# Altium PCB etb_drv.PcbDoc (part 2 of 2)
Units mil, origin at the board's own origin, x right, y up, seen from the top; angles counter-clockwise.
Board outline 2950 x 2250 mil, 2 copper layers (Top Layer, Bottom Layer), stack 44.882 mil thick; 125 components, 73 nets, 385 pads, 207 vias.
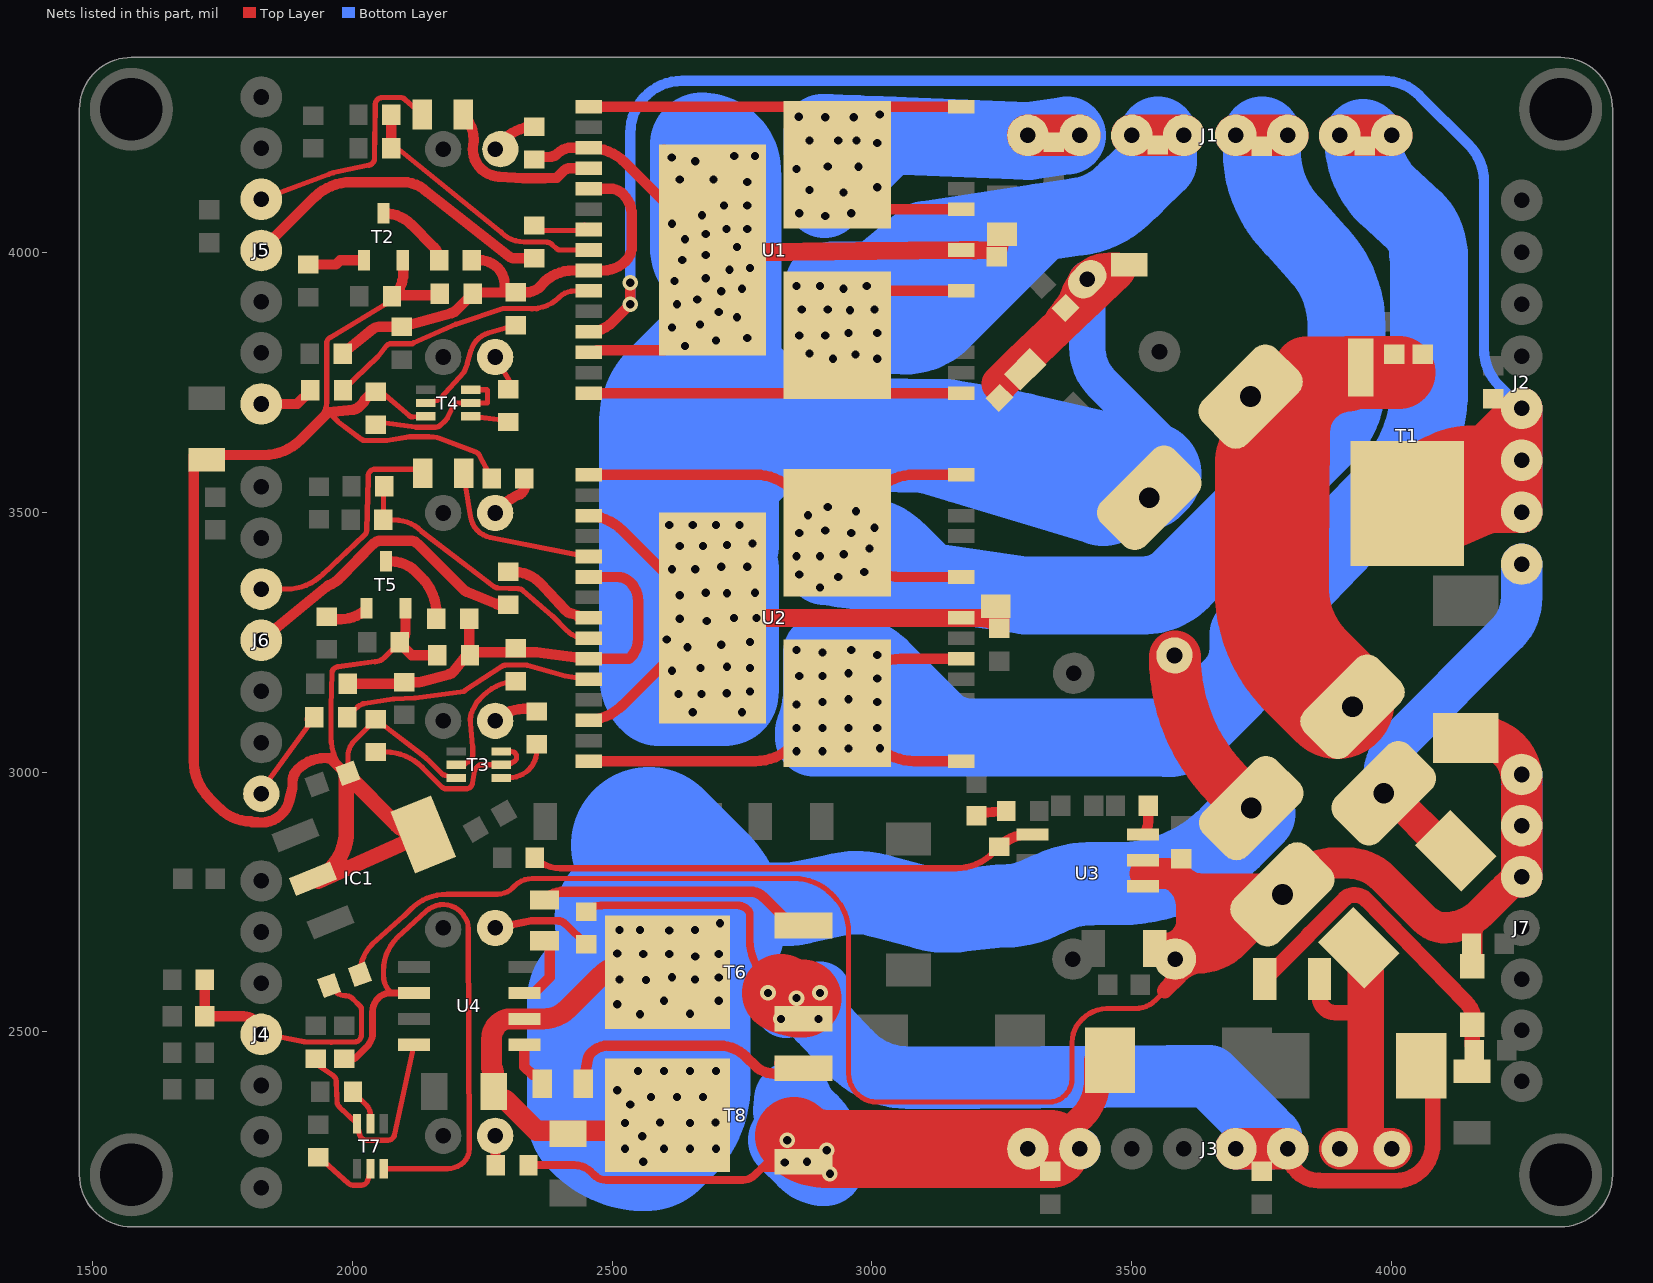
[diagram p2: the nets of this part, all layers, seen from the top]

## Via types
v1: diameter 30, hole 15.75, Top Layer to Bottom Layer, 199 vias
v2: diameter 30, hole 15.75, Top Layer to Bottom Layer, tented both sides, 6 vias
v3: diameter 40, hole 20, Top Layer to Bottom Layer, 2 vias

## Nets (pads, with @x,y where several pads share a name; then routed paths per layer and width w, separated by ;. In a path a pad name is that pad's centre, name@x,y a point inside that pad or via, vN(x,y) a via of type N, cw(c..) or ccw(c..) an arc to the next point about the centre after c; other vN are vias at no path point) (continued)
Hout1: C40.2 D5.1 J3.3 J3.4 R36.2 T6.1 | length 2305
  Top Layer w15: R36.2@2450,2731.5 cw(c2478.1,2703.39) 2478.1,2743.14 2479.53,2743.14 2739.88,2743.74 cw(c2739.88,2714.44) 2760.59,2735.16 cw(c2749.96,2724.52) 2765,2724.52 2765,2676.42 ccw(c2865,2676.42) 2794.29,2605.71 2825,2575
  Top Layer w30: J3.3@3800,2274 ccw(c3860,2274) 3860,2214 4007.16,2213.57 ; 4007.37,2213.57 ccw(c4007.37,2285.2) 4079,2285.2 4079,2422.89 ccw(c4056.89,2422.89) D5.1@4056.89,2445
  Top Layer w80: J3.4@3700,2275 J3.3@3800,2275
  Top Layer w150: 2825,2575 ccw(c2866.47,2649.61) v1@2866.47,2564.25
  Bottom Layer w80: J3.4@3700,2275 3743.92,2274.56
  Bottom Layer w120: 2834.58,2547.9 ccw(c2682.82,2704.39) 2837.44,2550.73 2841.4,2550.73 ccw(c2841.4,2633.6) 2868.25,2555.2 ; v1@2856.95,2567.09 2862.81,2560.93 2868.25,2555.2 ; v1(2900,2575) cw(c2841.4,2633.6) 2896.81,2571.97 cw(c2841.4,2633.6) 2868.25,2555.2 ; 3095.61,2412 3071.5,2412 ccw(c3071.33,2292) 3070.75,2412 cw(c3070,2565) 2959.09,2459.61 v1(2897.39,2524.54) 2873.43,2549.75 2868.25,2555.2 ; 3095.63,2412 3200,2412 ccw(c3200,2500) 3200.64,2412 3573.37,2414.73 cw(c3574.39,2294.73) 3573.74,2414.73 3574.06,2414.73 3649.12,2414.73 3744.37,2319.26 J3.3@3768.46,2295.11
  other v1: 2825,2525 2854.81,2565.05 2800,2575
Hout2: C41.2 D6.1 J3.7 J3.8 R35.2 T8.1 | length 1687.8
  Top Layer w15: R35.2@2339.1,2243.64 2427.07,2243.64 cw(c2427.07,2197.07) 2460,2230 2465.39,2224.61 ccw(c2488.59,2247.82) 2488.59,2215 2750.86,2215 ccw(c2750.86,2249.14) 2775,2225 2787.62,2237.62 ; 2787.62,2237.62 2855.77,2237.62 T8.1@2868.39,2250.24 2800.23,2250.24 2787.62,2237.62
  Top Layer w50: 3343.29,2275 3403.82,2335.53 ccw(c3333.11,2406.24) 3433.11,2406.24 D6.1@3433.11,2445
  Top Layer w150: 2850,2300 ccw(c2910.36,2360.36) 2910.36,2275 J3.8@3300,2275 3343.29,2275
  Bottom Layer w80: J3.8@3300,2275 J3.7@3400,2275
  Bottom Layer w150: v1(2836.86,2291.56) 2873.17,2255.25 ccw(c2910,2292.08) 2910,2240 2910,2253.58 ccw(c2810,2253.58) 2880.71,2324.29 2865,2340 cw(c2865,2364.14) 2847.93,2347.07 2845.96,2349.04 ccw(c2516.57,2398) 2848.28,2368.63
  other v1: 2918.99,2227.09 2832.19,2248.62 2875,2250 2912.94,2272.18
in1: R41.1 T7.6 U4.2 | length 1107.4
  Top Layer w10: 2068.46,2236.69 2182.87,2236.69 ccw(c2182.87,2282.13) 2215,2250 ccw(c2190.86,2274.14) 2225,2274.14 2223,2700.14 ccw(c2175,2700) 2221.71,2711.04 2217.83,2718.67 ccw(c2175,2697) 2142.67,2732.48 2086.87,2681.78 ccw(c2151.74,2616.92) 2060,2616.92 2060,2609.14 ccw(c2108.28,2609.14) 2074.14,2575
  Top Layer w13: 2005,2448.5 2027.47,2470.61 ccw(c2004.69,2493.78) 2034.18,2480.13 2037.97,2488.3 ccw(c2026.18,2493.78) 2039.19,2493.78 2039.19,2538.89 cw(c2076.11,2538.89) 2050,2565 cw(c2074.14,2540.86) 2074.14,2575 U4.2@2118.7,2575
in2: R45.1 T7.3 U4.4 | length 435.6
  Top Layer w10: R45.1@1930,2448.5 1930,2444.14 ccw(c1940,2444.14) 1934.26,2435.95 1963.68,2415.33 cw(c1956.22,2404.69) 1969.21,2405.15 1970.79,2364.8 ccw(c1983.78,2365.31) 1974.87,2355.85 2009.14,2323.57 cw(c2002.32,2316.26) T7.3@2009.41,2323.31 2014.47,2301.65 ccw(c2027.13,2304.61) 2027.13,2291.61 2068.46,2291.61 ccw(c2068.46,2304.61) 2074.22,2292.95 ccw(c2068.46,2304.61) 2081.18,2301.88 U4.4@2118.7,2475
ina_2sp30: J6.5 R6.1 | length 465.3
  Top Layer w10: J6.5@1825,3351.89 1873.21,3351.89 ccw(c1873.21,3451.89) 1943.92,3381.18 cw(c1951.03,3374.14) 1944.15,3381.41 2023.61,3455.83 ccw(c2014.72,3465.31) 2027.72,3464.94 2030.77,3563.79 ccw(c2007.78,3564.56) 2030.78,3564.56 2030.78,3569.69 cw(c2043.78,3569.69) 2043.78,3582.69 2117.08,3582.69 cw(c2117.08,3556.45) R6.1@2135.63,3575
ina_5019: J5.5 R4.1 | length 455.8
  Top Layer w10: J5.5@1825,4101.89 1954.98,4150.25 cw(c1997.96,4035) 1973.31,4155.5 2032.33,4167.58 ccw(c2029.72,4180.31) 2039.44,4171.67 ccw(c2029.72,4180.31) 2042.72,4180.16 2044.28,4284.88 cw(c2057.28,4284.69) 2057.28,4297.69 2092.72,4297.69 cw(c2092.72,4284.69) 2101.4,4294.36 R4.1@2135.77,4263.69
  Top Layer w20: R4.1@2135.77,4263.69 ccw(c2135.77,4269.06) R4.1@2139.57,4265.26
inb_2sp30: J6.1 R9.1 | length 189.6
  Top Layer w10: J6.1@1825,2958.19 1825,2961.57 cw(c1835,2961.57) 1826.91,2967.45 R9.1@1927.01,3105
  Top Layer w20: R9.1@1918.14,3101.33 cw(c1927.01,3092.45) R9.1@1927.01,3105
inb_5019: J5.1 R8.1 | length 106.5
  Top Layer w20: J5.1@1825,3708.19 1894.56,3708.19 1919.28,3732.91 R8.1@1919.28,3734.88
led_2sp30: LD4.2 R19.2 | length 100.4
  Top Layer w20: LD4.2@2278.6,3094.86 LD4.2@2275,3098.46 ; LD4.2@2281.61,3098.46 LD4.2@2275,3098.46 ; 2330.6,3121.5 ccw(c2330.61,3042.86) 2329.41,3121.49 ; R19.2@2355,3116.5 ccw(c2342.95,3104.45) 2342.95,3121.49 2329.41,3121.49 ; LD4.2@2275,3098.46 cw(c2330.61,3042.86) 2329.41,3121.49
led_3v: LD6.2 R32.2 | length 91.1
  Top Layer w20: LD6.2@2275,3498.46 2289.34,3512.8 cw(c2355,3447.14) 2319.97,3533.14 ccw(c2312.42,3551.66) 2330.19,3560.85 R32.2@2329.92,3561.37
led_5019: LD3.2 R30.2 | length 77.1
  Top Layer w10: LD3.2@2275,3798.46 2308.85,3741.78 2303.57,3736.5 R30.2@2300,3736.5
led_on: LD2.2 R5.2 | length 90.2
  Top Layer w20: LD2.2@2275,4198.46 2275,4200 2292.73,4217.73 cw(c2350,4160.47) R5.2@2350,4241.45
NetC34_2: C34.2 R38.1 | length 57.6
  Top Layer w20: C34.2@3201.06,2920.59 R38.1@3258.5,2925
NetLD1_2: LD1.2 R35.1 | length 56.8
  Top Layer w20: LD1.2@2275,2300 2275.55,2299.45 2275.55,2244.19 R35.1@2276.11,2243.64
NetLD5_2: LD5.2 R36.1 | length 198.9
  Top Layer w15: LD5.2@2275,2700 2344.36,2713.89 2398.76,2713.89 ; 2393.76,2713.89 cw(c2393.76,2690.25) 2410.47,2706.97 R36.1@2450,2668.5
NetR2_1: R2.1 R7.2 R12.2 R18.2 R27.2 U2.6 U2.10 | length 853.8
  Top Layer w20: R7.2@1991.5,3170 R12.2@2092.78,3170 ; R12.2@2100,3172.99 2127.96,3172.99 ccw(c2127.96,3192.99) 2133.18,3173.68 2185.92,3187.94 ccw(c2181.22,3205.31) 2195.25,3194.03 2214.39,3217.84 cw(c2229.98,3205.3) 2215.84,3219.45 2223.94,3227.55 R2.1@2225,3228.61 ; R27.2@2225,3295 R2.1@2225,3228.61 ; R2.1@2226.5,3225 ccw(c2221.39,3225) R2.1@2225,3228.61 ; R2.1@2239.98,3230.58 2315,3230.58 2354.45,3230.58 2450,3217.83 2529.77,3217.83 ccw(c2529.77,3225.23) 2535,3220 ccw(c2498.79,3256.21) 2550,3256.21 2550,3328.79 ccw(c2498.79,3328.79) 2535,3365 ccw(c2510.1,3340.1) 2510.1,3375.31 U2.6@2450,3375.31
NetR3_2: R3.2 T2.1 | length 111
  Top Layer w20: R3.2@1915,3976.5 1968.62,3976.5 1976.85,3984.72 T2.1@2022.6,3984.72
NetR4_2: R4.2 U1.4 | length 332.4
  Top Layer w20: R4.2@2213.43,4265.26 cw(c2164.71,4216.54) 2233.62,4216.54 cw(c2213.62,4216.54) 2233.48,4214.17 2232.36,4204.63 ccw(c2285,4198.46) 2233.62,4185.47 ccw(c2285,4198.46) 2275.59,4146.3 ccw(c2285,4198.46) 2281.82,4145.56 2329.26,4142.78 ccw(c2330.31,4160.75) 2330.31,4142.75 2369.69,4142.75 ccw(c2369.69,4160.75) 2371.63,4142.85 ccw(c2369.58,4162.75) 2371.73,4142.86 2389.81,4142.86 ccw(c2389.81,4150.23) 2394.99,4144.99 2406.58,4156.58 cw(c2419.4,4143.75) 2419.4,4161.89 U1.4@2455,4161.89
NetR6_2: R6.2 U2.5 | length 331.2
  Top Layer w10: R6.2@2214.37,3575 2227.58,3491 ccw(c2275,3498.46) 2265.63,3451.39 2447.46,3415.19 2448.43,3415 U2.5@2449.69,3415
NetR8_2: R8.2 U1.10 | length 555.6
  Top Layer w10: R8.2@1982.28,3734.88 2049.48,3799.5 ; 2050.43,3800.55 2065.07,3819.23 cw(c2075.31,3811.22) 2074.85,3824.21 ; 2069.41,3822.8 cw(c2075.31,3811.22) 2075.31,3824.22 2114.69,3824.22 cw(c2114.69,3811.22) 2115.6,3824.19 ccw(c2110.29,3833.7) 2117.99,3825.99 2199.11,3861.39 2210,3865 ; 2204.55,3863.2 2290.29,3892.08 2354.49,3891.51 ; 2345.16,3891.5 ccw(c2345.16,3967.16) 2348.21,3891.56 ccw(c2345.16,3967.16) 2398.66,3913.66 cw(c2427.65,3884.68) 2427.65,3925.67 ; 2423.39,3925.67 2427.65,3925.67 ; U1.10@2455,3925.67 2427.65,3925.67
NetR9_2: R9.2 U2.11 | length 490.2
  Top Layer w10: R9.2@1990,3105 2010.71,3125.71 ; 2010.74,3125.74 cw(c2017.74,3118.6) 2013.09,3127.45 2019.21,3130.69 cw(c2025.31,3119.21) 2023.35,3132.06 2078.3,3140.56 cw(c2080.31,3127.72) 2079.84,3140.71 2120.19,3142.29 ccw(c2119.69,3155.28) 2121.42,3142.39 2215,3155 2215.71,3155.71 ; 2215.74,3155.74 cw(c2222.74,3148.6) 2217.28,3156.98 2288.17,3203.58 cw(c2295.31,3192.72) 2295.31,3205.72 2334.69,3205.72 cw(c2334.69,3192.72) 2338.23,3205.22 2410,3185 U2.11@2450,3178.46
NetR10_1: R10.1 R11.1 R15.2 R17.2 R22.2 U1.5 U1.9 | length 921.4
  Top Layer w20: R15.2@1981.5,3805 2039.09,3851.98 cw(c2051.74,3836.5) 2051.74,3856.5 R17.2@2095,3856.5 2189.02,3882.47 ; 2190.16,3882.75 ccw(c2186.22,3900.31) 2198.92,3887.56 R11.1@2231.5,3920 ; R10.1@2230,3985 2243.79,3985 cw(c2243.79,3933.79) 2280,3970 cw(c2248.9,3938.9) 2292.88,3938.9 2292.88,3922.68 ; R11.1@2239.21,3922.68 2292.88,3922.68 ; 2363,3935.25 2369.64,3942.14 ; 2367.12,3940.87 cw(c2425.47,3882.52) 2376.29,3948.78 ; U1.5@2455,4122.52 2495.6,4122.52 cw(c2495.6,4086.6) 2521,4112 cw(c2479.96,4070.96) 2538,4070.96 2538,4011.97 cw(c2497.03,4011.97) 2526,3983 cw(c2482.64,4026.36) 2482.64,3965.04 U1.9@2455,3965.04 2425.47,3965.04 ccw(c2425.47,3882.52) 2376.29,3948.78 ; 2292.88,3922.68 2314.68,3922.68 R22.2@2315,3922.99 2334.01,3922.99 ccw(c2334.01,3963.99) 2363,3935 2363,3935.49 2376.29,3948.78
NetR10_2: R10.2 T2.3 | length 148.4
  Top Layer w20: T2.3@2060,4075.28 cw(c2060,3998.15) 2114.53,4052.69 2156.25,4010.97 cw(c2130.28,3985) R10.2@2167.01,3985
NetR13_2: R13.2 U1.7 | length 112.3
  Top Layer w10: R13.2@2350,4051.5 2359.52,4041.97 U1.7@2446.81,4041.97 ; U1.7@2446.81,4051.97 U1.7@2455,4043.78
NetR14_2: R14.2 U2.8 | length 195.1
  Top Layer w20: R14.2@2300,3385 2311.72,3385 cw(c2311.72,3316.72) 2360,3365 2360.04,3364.96 cw(c2345.93,3350.79) 2360.53,3364.46 2411.3,3310.51 ccw(c2424.41,3322.85) 2419.34,3305.58 2437.63,3300.21 2450,3296.57 U2.8@2436.56,3296.57
NetR16_1: R16.1 T3.5 T3.6 | length 369.7
  Top Layer w10: R16.1@2045,3038.5 2063.79,3038.5 cw(c2063.79,2938.5) 2134.5,3009.21 2171.32,2972.4 ccw(c2181.34,2980.68) 2178.46,2968 2179.88,2967.68 2218.74,2967.68 ccw(c2218.74,2980.68) 2231.59,2978.75 ; 2231.6,2978.79 2235.11,3001.87 cw(c2244.99,3000.32) 2238.3,3007.76 2239.46,3008.8 ccw(c2218.74,3031.86) 2240.62,3009.9 2241.97,3011.24 cw(c2249.01,3004.14) 2248.9,3014.14 2248.95,3014.14 T3.5@2286.65,3014.14 2292.65,3014.14 ccw(c2292.65,3047.41) 2311.99,3020.34 ccw(c2306.18,3028.48) 2316.17,3028.81 2316.15,3029.6 ccw(c2306.15,3029.3) 2309.49,3038.73 ccw(c2303.6,3021.95) 2303.6,3039.73 T3.6@2286.65,3039.73
NetR18_1: R18.1 T3.2 | length 230.6
  Top Layer w10: T3.2@2209.49,3014.14 ccw(c2209.49,3031.41) 2221.69,3019.2 ccw(c2218.74,3031.86) 2231.74,3031.86 2231.74,3047.61 ccw(c2218.74,3047.61) 2231.67,3048.91 2227.23,3093.73 cw(c2275,3098.46) 2232.54,3120.85 2240,3135 2252.17,3147.17 cw(c2317.99,3081.36) 2317.99,3174.44 ccw(c2316.63,3173.07) 2316.63,3175 R18.1@2315,3175
NetR19_1: R19.1 T3.4 | length 111.4
  Top Layer w10: T3.4@2286.65,2988.55 T3.4@2287.37,2989.27 ; T3.4@2288.08,2989.98 T3.4@2287.37,2989.27 ; R19.1@2355,3053.5 2355,3041.88 cw(c2302.19,3041.88) 2339.53,3004.53 cw(c2302.69,3041.38) 2302.69,2989.27 T3.4@2287.37,2989.27
NetR20_2: R20.2 R23.2 U2.9 | length 532.5
  Top Layer w10: R23.2@2061.5,3550 ccw(c2065.11,3546.39) 2060,3546.39 R20.2@2060,3485 2080.76,3485 cw(c2080.76,3411.16) 2132.97,3463.37 2272.43,3356.95 ccw(c2280.31,3367.28) 2272.7,3356.74 ccw(c2280.31,3367.28) 2279.81,3354.29 2320.11,3352.72 ; 2320.16,3352.72 cw(c2319.69,3339.72) 2328.27,3349.49 ; 2328.3,3349.46 2384.46,3300.51 cw(c2377.91,3292.95) 2384.99,3300.01 2412.1,3272.9 ccw(c2450,3310.81) U2.9@2450,3257.2
NetR21_1: R21.1 T4.5 T4.6 | length 291.2
  Top Layer w10: R21.1@2050,3673.5 2121.21,3663.66 ccw(c2122.99,3676.54) 2122.99,3663.54 2160.39,3663.54 ccw(c2160.39,3676.54) 2169.29,3667.06 2180.56,3677.64 ccw(c2173.71,3684.93) 2182.7,3680.55 2194.3,3704.38 cw(c2203.29,3700) 2203.29,3710 T4.5@2228.31,3710 2260,3710 2260,3735 ccw(c2258.57,3733.57) 2258.57,3735.59 T4.6@2228.31,3735.59
NetR22_1: R22.1 T4.2 | length 246.3
  Top Layer w10: T4.2@2141.69,3710 2163.35,3715.06 ccw(c2160.39,3727.72) 2170.05,3719.01 2215.25,3769.17 2219.88,3781.44 ccw(c2175,3798.46) 2221.08,3785.02 2228.92,3811.9 cw(c2275,3798.46) 2261.7,3844.58 R22.1@2315,3860
NetR26_2: R26.2 R29.2 U1.8 | length 512.5
  Top Layer w10: R26.2@2075,4200 2083.58,4200 cw(c2083.58,4190) 2089.91,4197.74 2286.13,4038.78 cw(c2279.87,4030.99) 2286.97,4038.03 ; 2287,4038 ccw(c2330.46,4081.46) 2330.46,4020 2375.59,4019.19 ; 2374.97,4019.22 cw(c2374.69,4006.22) 2385.05,4014.07 2392.01,4008.35 ccw(c2399.97,4014.41) 2399.97,4004.41 U1.8@2455,4004.41
  Top Layer w20: R26.2@2075,4200 R29.2@2075,4265
NetR27_1: R27.1 T5.3 | length 170.8
  Top Layer w20: T5.3@2065,3405.28 2074.56,3405.28 cw(c2074.56,3338.07) 2122.09,3385.59 2132.72,3374.96 cw(c2062.01,3304.25) 2162.01,3304.25 R27.1@2162.01,3295 ccw(c2154.78,3295) R27.1@2159.89,3300.11
NetR28_2: R28.2 T5.1 | length 82.1
  Top Layer w20: R28.2@1950.98,3294.08 1977.75,3294.08 ccw(c1977.75,3364.57) T5.1@2027.6,3314.72
NetR30_1: R30.1 T4.4 | length 80.2
  Top Layer w10: T4.4@2228.31,3684.41 R30.1@2304.62,3675.33 ; R30.1@2299.62,3670.33 2299.62,3673.13 R30.1@2300,3673.5
NetR40_2: R40.2 T6.2 | length 539.7
  Top Layer w20: R40.2@2387.59,2760.71 2380.61,2753.74 R40.2@2370,2753.74 cw(c2409.25,2714.49) 2409.25,2770 2764.29,2770 cw(c2764.29,2731.42) 2791.57,2758.7 2822.25,2728.02 ccw(c2864.47,2770.24) T6.2@2864.47,2710.53
NetR42_2: R42.2 T7.2 | length 74.4
  Top Layer w10: R42.2@2001.5,2385 2026.87,2359.62 ; 2026.87,2359.63 cw(c2007.25,2340) 2035,2340 T7.2@2035,2323.31
NetR44_2: R44.2 T8.2 | length 507.6
  Top Layer w20: R44.2@2441.29,2416.5 2444.37,2413.42 R44.2@2444.37,2400 2453.03,2447.22 cw(c2472.86,2444.57) 2458.64,2458.63 ; 2460,2460 cw(c2493.08,2426.92) 2493.08,2473.7 2705,2473.7 cw(c2705,2398.14) 2758.43,2451.57 2775,2435 ccw(c2811.78,2471.78) 2811.78,2419.76 ; T8.2@2821.78,2439.76 T8.2@2878.39,2439.76
NetR46_2: R46.2 T7.5 | length 156.9
  Top Layer w10: R46.2@1935,2258.5 1936.97,2258.5 1992.85,2208.32 ccw(c2001.54,2217.99) 2001.54,2204.99 2017.28,2204.99 ccw(c2017.28,2217.99) 2029.95,2215.06 T7.5@2035,2236.69 2035,2225.87 T7.5@2032.13,2222.99
out1: R40.1 U4.7 | length 138
  Top Layer w20: U4.7@2331.3,2575 2350,2575 2379.81,2604.81 2379.81,2675.19 R40.1@2375,2680
out2: R44.1 U4.5 | length 95.1
  Top Layer w20: U4.5@2331.3,2475 2331.3,2433.19 2346.93,2417.56 2356.93,2417.56 2365.63,2408.86 R44.1@2365.63,2400
outa_2sp30: C16.2 J1.5 J1.6 U2.1 U2.25 U2.30 U2.31 | length 3181.4
  Top Layer w20: U2.1@2450,3572.16 U2.1@2455,3572.16 2775.31,3572.16 cw(c2775.31,3472.16) 2846.02,3542.87 U2.31@2928.35,3460.55 ; U2.25@3166.54,3375.31 3055,3375.31 cw(c3055,3475.31) 2984.29,3404.6 U2.31@2928.35,3460.55 ; U2.30@3166.54,3572.16 3081.38,3572.16 ccw(c3081.38,3472.16) 3010.67,3542.87 v1(2969.51,3501.71) U2.31@2928.35,3460.55
  Top Layer w80: J1.5@3700,4225 J1.6@3800,4225
  Bottom Layer w150: 3750,4225 3750,4195.3 ccw(c3955.39,4195.3) 3810.16,4050.07 ; 3810.51,4050.38 3861.28,3993.13 ; 3862.66,3992.06 cw(c3712.26,3859.1) 3913,3859.1 3913,3744.5 ; 3878.7,3654.89 3594.29,3369.29 cw(c3523.58,3440) 3523.58,3340 3294.91,3339.96 3104.44,3367.84 ; 3881.2,3656.48 ccw(c3768.49,3747.5) 3913.36,3747.5 ; 3104.44,3367.84 2992.45,3384.24 2988.39,3384.83 2985.05,3385.32 2949.82,3390.48 2941.55,3391.69 2937.53,3392.28 2908.35,3396.55 2908.35,3454 ccw(c2910,3840) 2915.84,3454.04 2976.82,3454.04 cw(c2976.82,3354.04) 3047.53,3424.75 3104.44,3367.84
  other v1: 2900,3355 2935,3375 2860,3380 2985,3385 2855,3415 2900,3415 2945.56,3419.12 2995,3430 2860,3460 2960,3460 2910,3465 3005,3470 2877.09,3494.01 2915,3510
outa_5019: C14.2 J1.1 J1.2 U1.1 U1.25 U1.30 U1.31 | length 1965.4
  Top Layer w20: U1.1@2455,4280 2840,4280 v1(2859.12,4260.88) 2933.35,4186.65 U1.31@2933.35,4168.39 3018.58,4083.15 U1.25@3171.54,4083.15 ; U1.31@2928.35,4194.96 3013.39,4280 U1.30@3171.54,4280
  Top Layer w80: J1.1@3300,4225 J1.2@3400,4225
  Bottom Layer w150: J1.2@3375,4225 3301.67,4213.94 3299.56,4214.02 3038.56,4224.59 ; 3038.56,4224.59 ccw(c3038.56,4205.03) 3024.73,4218.86 2908.59,4102.72 2908.59,4143.4 ccw(c2725.59,4143.4) 2908.33,4153.11 ccw(c2725.42,4158.76) 2907.84,4173.25 ccw(c2672.94,4154.52) 2905,4195.47 2905,4230 2908.78,4229.85 2917.61,4229.49 2935.56,4228.76 2963.69,4227.62 2970.5,4227.35 2976.63,4227.1 3010.64,4225.72 3013.41,4225.61 3038.56,4224.59
  other v1: 2910,4070 2860,4075 2960,4075 2945,4115 2880,4120 3010,4125 2855,4160 2915,4165 2974.1,4164.53 3010,4210 2880,4215 2935,4215 2970,4215 2910,4260 2965,4260 3015,4265
outb_2sp30: C15.2 J1.7 J1.8 U2.15 U2.16 U2.21 U2.32 | length 3784
  Top Layer w20: U2.15@2455,3020.98 2775.31,3020.98 ccw(c2775.31,3120.98) 2846.02,3050.27 U2.32@2928.35,3132.6 ; U2.32@2930.85,3130.1 3010.67,3050.27 ccw(c3081.38,3120.98) 3081.38,3020.98 U2.16@3166.54,3020.98 ; U2.32@2984.29,3188.54 cw(c3055,3117.83) 3055,3217.83 U2.21@3166.54,3217.83
  Top Layer w80: J1.7@3900,4225 J1.8@4000,4225
  Bottom Layer w150: v1@2903.4,3149.22 cw(c2720.77,3160.91) 2903.4,3149.17 ccw(c2928.35,3147.6) 2903.35,3148.11 cw(c2720.38,3151.4) 2888.1,3078.19 2888.1,3066.16 3190.26,3066.16 ; v1@2903.4,3149.26 ccw(c2720.77,3160.91) 2903.77,3160.91 ccw(c2720.77,3160.91) 2903.77,3161.1 2903.77,3228.73 cw(c2945.81,3189.19) v1(2905,3230) 2943.58,3230 cw(c2943.58,3130) 3014.29,3200.71 3119.55,3095.45 ccw(c3190.26,3166.16) 3190.26,3066.16 ; 3297.73,3066.16 3190.26,3066.16 ; 3562.45,3066.16 3190.26,3066.16 ; 3566.72,3065 ccw(c3566.72,3133.28) 3615,3085 3694.98,3164.98 ccw(c3624.27,3235.69) 3724.27,3235.69 3724.27,3264.27 3992.3,3541.81 ; 3950,4215 3945,4220 ccw(c4101.92,4220) 3990.96,4109.04 4043.74,4061.26 cw(c3980.34,3997.86) 4070,3997.86 ; 3992.82,3542.34 3992.3,3541.81 ; 4072,3997.86 4072,3738.31 cw(c3789.9,3738.31) 3992.3,3541.81
  other v1: 2855,3040 2905,3040 2955,3045 3015.45,3045.8 2855,3085 2905,3085 2955,3085 3010,3085 2855,3130 2905,3135 3010,3135 2955,3140 3010,3180 2860,3185 2905,3185 2955,3190 3010,3225 2855,3235 2960,3235
outb_5019: C13.2 J1.3 J1.4 U1.15 U1.16 U1.21 U1.32 | length 2366.6
  Top Layer w20: U1.15@2455,3728.82 2840,3728.82 U1.32@2933.35,3822.17 ; U1.32@2949.53,3805.99 3026.69,3728.82 U1.16@3171.54,3728.82 ; U1.32@3018.58,3925.67 U1.21@3171.54,3925.67
  Top Layer w80: J1.3@3500,4225 J1.4@3600,4225
  Bottom Layer w150: v1@2915,3852.07 v1(2915,3890) 2915,3919.52 ccw(c2893.1,3919.52) 2908.59,3935 2908.59,3941.33 cw(c2925.19,3909.81) 2925.19,3945.43 3008.35,3945.43 3101.94,4024.03 3321.83,4057.19 ; v1@2917.44,3844.98 2950.45,3841.96 cw(c2953.26,3428.97) v1@2959.85,3841.92 ; v1@2959.89,3841.92 2969.1,3841.78 3004.24,3841.23 3009.94,3841.14 3010.72,3841.13 3062.46,3840.32 3069.69,3840.21 ccw(c3063.21,3940) 3133.93,3869.29 3321.83,4057.19 ; 3550,4225 3550,4175 3504.29,4129.29 cw(c3433.58,4200) 3492.06,4118.89 cw(c3375,4225) 3405.99,4070.07 cw(c3375,4225) 3398.56,4068.77 3321.83,4057.19
  other v1: 2925,3795 3010,3795 2968.51,3803.51 2880,3805 2860,3840 2910,3840 2955,3845 3010,3845 2957.76,3888.4 2865,3890 3005,3890 2945,3930 2855,3935 2900,3935 2990,3935
pwm_2sp30: J6.4 R14.1 | length 590.4
  Top Layer w20: J6.4@1825,3253.46 1951.07,3356.67 1951.11,3356.7 cw(c1963.69,3341.15) 1954.99,3359.16 1961.77,3362.44 ccw(c1944.15,3398.92) 1972.83,3370.3 1976.28,3373.75 ccw(c1960,3390) 1976.4,3373.87 2040.75,3439.03 cw(c2055,3425) 2041.46,3439.72 cw(c2055,3425) 2055,3445 2111.21,3445 cw(c2111.21,3423.79) 2126.21,3438.79 2213.7,3351.3 ccw(c2227.79,3365.5) 2220.12,3347.02 2276.75,3323.53 ccw(c2284.41,3342.01) 2284.41,3322.01 R14.1@2300,3322.01
pwm_5019: J5.4 R13.1 | length 623.8
  Top Layer w20: J5.4@1825,4003.46 1927.25,4105.71 cw(c1997.96,4035) 1997.96,4135 2096.72,4135 cw(c2096.72,4066.72) 2145,4115 2300.56,3992.78 ccw(c2312.92,4008.5) 2312.92,3988.5 R13.1@2350,3988.5
sense: R37.1 R39.2 U3.5 | length 982
  Top Layer w12: R37.1@2351.5,2835 ccw(c2399.78,2883.28) 2399.78,2815 3162.08,2815 ccw(c3162.08,2915) 3232.79,2844.29 R39.2@3245,2856.5
  Top Layer w20: R39.2@3245,2856.5 cw(c3301.74,2799.75) 3301.74,2880 U3.5@3309.02,2880
ss: C33.2 U3.4 | length 57.6
  Top Layer w20: U3.4@3521.61,2880 ccw(c3497.76,2903.86) 3531.5,2903.86 C33.2@3531.5,2935
v_d: C23.2 C24.2 D3.1 F3.1 | length 635.8
  Top Layer w30: F3.1@3755.94,2601.76 3838.67,2684.49 cw(c3858.09,2672.18) 3841.85,2688.46 3910.02,2756.63 cw(c3926.3,2740.38) 3926.4,2763.38 3929.2,2763.38 cw(c3929.19,2733.38) 3950.38,2754.62 4141.4,2558.6 cw(c4096.51,2513.7) D3.1@4160,2513.7 ; D3.1@4155,2513.7 4155,2479.07 ccw(c4185,2479.07) C23.2@4158.5,2465
v_main: D2.1 F2.2 J2.8 | length 777
  Top Layer w40: F2.2@3980.24,2974.32 F2.2@3999.55,2974.32 ; D2.1@4118.26,2843.26 ccw(c4135.06,2843.26) D2.1@4123.18,2831.38
  Top Layer w60: F2.2@3980.24,2974.32 D2.1@4123.18,2831.38
  Bottom Layer w60: F2.2@3984.55,2959.32 F2.2@3984.98,2959.32
  Bottom Layer w80: F2.2@3984.98,2959.32 3984.98,2988.56 cw(c4084.98,2988.56) 4014.27,3059.27 4220.71,3265.71 ccw(c4150,3336.42) 4250,3336.42 J2.8@4250,3400
Vbrige: C4.2 C5.2 C6.2 C7.2 C8.1 C9.2 C10.2 C11.2 C12.2 F1.1 R5.1 U1.3 U1.13 U1.23 U1.33 U2.3 U2.13 U2.23 U2.33 | length 8463.3
  Top Layer w20: R5.1@2350,4178.46 cw(c2361.84,4166.62) 2361.84,4183.37 2378.99,4183.37 ccw(c2378.99,4206.01) 2395,4190 cw(c2422.18,4162.82) 2422.18,4201.26 U1.3@2455,4201.26 cw(c2455,4101.46) 2525.57,4172.03 U1.33@2693.19,4004.41 ; U2.13@2450,3099.72 ccw(c2450,3199.52) 2520.57,3128.95 2688.19,3296.57 2520.57,3464.19 ccw(c2450,3393.62) U2.3@2450,3493.42 ; U1.13@2455,3807.56 2467.5,3807.56 2471.59,3811.65 2599.84,3811.65 2693.19,3905 2693.19,3999.49 U1.33@2693.19,4004.41 ; U1.33@2599.84,4197.17 v1(2614.63,4182.37) 2693.19,4103.82 U1.33@2693.19,4004.41
  Top Layer w35: U2.33@2688.19,3296.57 U2.33@2693.19,3296.57 U2.23@3171.54,3296.57 U2.23@3179.85,3296.57 ; U1.33@2693.24,3999.49 2735.91,3999.93 2764.69,4000.23 U1.23@3171.54,4004.41 3192.41,4004.41 cw(c3192.41,3969.41) 3197.62,4004.02 3197.76,4004 ; U2.23@3182.12,3296.65 cw(c3179.85,3331.57) U2.23@3179.85,3296.57 ; 3201.06,4004.41 C4.2@3240.19,4002.22 ; C4.2@3240,3991.5 C5.2@3250,4034.57 ; C9.2@3247,3276.5 C9.2@3247,3279.5 ; C10.2@3247,3310.34 C9.2@3247,3279.5 ; U2.23@3179.85,3296.57 3210.93,3296.57 cw(c3210.93,3250.71) 3243.36,3283.14 C9.2@3247,3279.5
  Top Layer w70: 3245.7,3747.14 3283.98,3785.53 3284.25,3785.78 3383.71,3880.75 3433.18,3927.98 3471.82,3964.89 3458.65,3964.77 3458.5,3964.77 ccw(c3459.4,3894.78) 3416.85,3950.36 C8.1@3413.94,3948.13 3403.37,3929.4 ccw(c3464.34,3895.01) 3397.49,3915.75 cw(c3327.73,3937.27) 3383.86,3890.6 3380.88,3886.48 3374.12,3877.18 cw(c3315,3920) 3366.64,3868.4 3366.5,3868.26
  Bottom Layer w70: 2955.37,3647.43 2997.46,3689.53 ; 3240,3630 3285.2,3630 3506.23,3630 cw(c3506.23,3530) 3576.94,3600.71 3590.93,3586.72 ccw(c3561.12,3586.72) 3582.2,3607.8 3443.57,3746.43 cw(c3514.28,3817.14) 3414.28,3817.14 3414.28,3948.13 C8.1@3413.94,3948.13
  Bottom Layer w150: v1(2682.22,3290.6) v1@2688.19,3296.57
  Bottom Layer w157.48: 3310,3555 3322.05,3556.21
  Bottom Layer w200: 2693.19,3545.94 cw(c2788.19,3514.71) 2717.48,3585.43 2727.92,3595.86 2812.94,3666.15 ; 2693.19,3651.52 2693.19,3757.78 ; v1@2720.77,3390 v1(2720.77,3344.06) v1(2720.77,3202.47) 2720.77,3160.91 ccw(c2928.35,3147.6) v1(2720.38,3151.4) cw(c2711.11,3183.89) 2711.11,3150.11 v1(2672.15,3150.11) v1(2627.69,3150.11) 2589.84,3150.11 cw(c2625.68,3185.94) 2575,3185.94 2575,3675 cw(c2671.17,3675) 2603.17,3743 v1@2693.19,3833.02 ; v1(2720.77,3437.09) 2720.77,3539.34 cw(c2820.77,3539.34) 2734.27,3589.51 ; 2725.42,4158.76 ccw(c2672.94,4154.52) 2672.94,4207.17 v1(2672.94,4071.42) 2672.94,4007.24 ccw(c2703.73,4007.24) 2693.19,3978.31 v1@2693.19,3833.02 ; 2725.59,4143.4 v1(2725.59,3966.23) 2725.59,3790.18 cw(c2693.19,3790.18) 2693.19,3757.78 ; 2753.34,3746.28 2803.99,3695.64 ; 2791.53,3642.52 2796.75,3651.39 2796.78,3651.44 ; 2843.92,3650.7 2847.19,3647.43 ; 3112.05,3635.34 3445,3535 ; 3223.97,3643.97 3285.2,3630 F1.1@3533.74,3573.28 ; F1.1@3505,3565.01 3509.94,3565.01 F1.1@3525,3565 ; 2693.19,3757.78 v1@2693.19,3833.02
  Bottom Layer w210: 2787.19,3642.43 2791.53,3642.52 ; 2989.05,3645.49 3059.45,3647.35
  Bottom Layer w220: v1@2688.19,3296.57 2688.19,3502.01 cw(c2788.19,3502.01) 2717.48,3572.72 2734.27,3589.51 2787.19,3642.43 ; 2791.53,3651.52 2796.78,3651.44 2843.92,3650.7 2853.75,3650.55 cw(c2850.51,3430.57) 2869.23,3649.78 2889.42,3648.07 cw(c2871.1,3428.84) 2891.92,3647.85 ccw(c2910,3840) 2928.74,3647.91 cw(c2950.14,3428.95) 2948.97,3648.95 2951.79,3648.97 cw(c2953.26,3428.97) 2956.72,3648.95 2956.88,3648.94 ; 2845.64,3649.07 3059.45,3647.35 3142.07,3646.06 3240,3630
  other v1: 2655,3115 2750,3115 2765,3155 2615,3195 2670,3200 2765,3200 2645,3240 2710,3245 2765,3250 2605,3255 2630,3295 2734.3,3296.57 2777.52,3296.57 2630,3340 2680,3345 2775,3345 2615,3390 2660,3390 2710,3395 2760,3395 2630,3435 2675,3435 2770,3440 2610,3475 2655,3475 2700,3475 2745,3475 2640,3820 2700,3830 2760,3835 2615,3855 2669.37,3861.34 2740,3875 2705,3885 2625,3900 2663.91,3908.91 2710,3925 2750,3930 2620,3945 2680,3950 2765,3970 2635,3985 2680,3995 2740,4010 2640,4025 2680,4035 2720,4045 2760,4045 2615,4055 2715,4090 2760,4090 2760,4135 2630,4140 2695,4140 2660,4175 2735,4185 2775,4185
Vcc: C26.2 C27.2 IC1.2 IC1.4 R1.2 R2.2 R11.2 R16.2 R21.2 R25.2 R32.1 T2.2 T3.3 T4.3 T5.2 | length 3771.3
  Top Layer w10: 1940.02,3685.02 ccw(c1913.98,3711.02) 1950.78,3711.02 1950.78,3824.69 cw(c1963.78,3824.69) 1957.13,3835.86 R1.2@2079.91,3909.29 ; 1954.02,3692.57 1972.3,3674.29 ccw(c1979.33,3681.4) 1973.35,3673.39 2017.53,3640.37 ccw(c2025.31,3650.79) 2025.31,3637.79 2064.69,3637.79 ccw(c2064.69,3650.79) 2066.78,3637.96 2110,3645 2146.71,3645 cw(c2146.71,3635) 2147.28,3644.98 2156.48,3644.49 cw(c2154.33,3603.54) 2168.97,3641.84 2237.67,3615.7 cw(c2233.07,3603.54) 2244.58,3609.59 R32.1@2268.34,3564.79 ; C26.2@1988.57,2995.72 cw(c2059.28,3066.43) 1959.28,3066.43 1959.28,3085.25 cw(c1972.28,3085.31) 1959.28,3085.31 1959.28,3124.69 cw(c1972.28,3124.69) 1959.3,3125.27 1959.31,3125.61 1960.78,3189.98 cw(c1973.78,3189.69) 1972.04,3202.57 2043.49,3212.33 ccw(c2043.49,3237.29) 2061.14,3219.64 R25.2@2091.5,3250 ; C26.2@1991.54,2995.72 1991.54,3029.82 cw(c2034.26,3029.82) 2004.05,3060.03 R16.2@2045.29,3101.26 ; R16.2@2045,3101.5 R16.2@2045.29,3101.26 ; R21.2@2050,3736.5 2109.5,3685.63 ccw(c2116.03,3693.2) 2116.51,3683.21 T4.3@2141.69,3684.41 ; T3.3@2200.04,2988.55 2178.38,2993.61 cw(c2181.34,3006.27) 2172.43,2996.8 cw(c2181.34,3006.27) 2172.15,2997.07 2147.2,3021.97 ccw(c2063.79,2938.5) 2135.39,3032.3 2045.55,3101.05 cw(c2051.63,3108.99) R16.2@2045.31,3101.24
  Top Layer w20: C27.2@1695,3608.58 1695,3021.42 ccw(c1795,3021.42) 1724.29,2950.71 1745.25,2929.75 ccw(c1805,2989.5) 1805,2905 ccw(c1809.12,2909.12) 1809.12,2903.29 1817.52,2903.29 ccw(c1825,2958.19) 1878.8,2944.97 1885,2970 1885,2980.86 cw(c1919.14,2980.86) 1895,3005 cw(c1948.16,2951.84) 1948.16,3027.02 1950.98,3027.02 cw(c1950.98,3011.85) 1961.71,3022.58 C26.2@1988.57,2995.72 ; C27.2@1720,3600.94 cw(c1741.86,3579.08) 1741.86,3610 1830.04,3610 ccw(c1830.04,3710) 1900.75,3639.29 1954.02,3692.57 2001.76,3697.28 ccw(c1999.99,3715.19) 2014.16,3704.09 2021.78,3711.7 ccw(c2017.33,3716.15) 2023.62,3716.15 2034.7,3727.24 cw(c2045,3716.93) R21.2@2045,3731.5 ; R25.2@2093.26,3250 ccw(c2071.2,3272.06) 2102.4,3272.06 T5.2@2102.4,3314.72 ; R25.2@2095.24,3251.76 2091.5,3248.03 2114.53,3225 R2.2@2163.5,3225 ; T2.2@2097.4,3984.72 2097.4,3983.09 ccw(c2100.49,3983.09) 2098.31,3980.91 2098.31,3960.94 cw(c2028.58,3960.94) 2083.12,3917.5 2166,3917.5 R11.2@2168.5,3920 ; R32.1@2268.34,3564.79 R32.1@2268.34,3571.58
  Top Layer w30: IC1.2@1934.63,2789.7 1964.36,2802.98 2134.24,2878.85 cw(c2134.24,2948.38) 2085.08,2899.21 1991.54,2992.75 C26.2@1988.57,2995.72 ; IC1.2@1959.28,2814.35 ccw(c1888.57,2885.07) 1988.57,2885.07 C26.2@1988.57,2992.75
Vhall: D2.2 F3.2 J3.1 J3.2 | length 976.6
  Top Layer w30: F3.2@3861.06,2601.76 3861.06,2567.04 ccw(c3891.06,2567.04) 3891.06,2537.04 3920,2537.04 cw(c3920,2507.04) 3950,2507.04 3950,2275
  Top Layer w70: D2.2@3931.74,2656.74 cw(c3887.66,2612.66) 3950,2612.66 3950,2537.04 3950,2507.04 3950,2275
  Top Layer w80: J3.2@3900,2275 3950,2275 J3.1@4000,2275
  Bottom Layer w70: J3.2@3900,2275 J3.1@4000,2275
Vhiside: C36.2 C37.2 C38.1 F4.2 T6.3 T8.3 U4.6 | length 3378.5
  Top Layer w40: C36.2@2420,2304.17 C36.2@2414.41,2309.76 ; T6.3@2546.42,2635 ccw(c2546.42,2535) 2475.71,2605.71 2415,2545 cw(c2366.72,2593.28) 2366.72,2525 U4.6@2331.3,2525 2304.14,2525 ccw(c2304.14,2490.86) 2280,2515 ccw(c2308.97,2486.03) 2268,2486.03 2268,2430.28 cw(c2258.14,2420.41) 2272.09,2420.41 C37.2@2272.09,2385 2272.09,2375.16 2277.68,2369.57 2294.53,2369.57 2354.33,2309.76 C36.2@2414.41,2309.76 ; T8.3@2606.57,2350 2595.63,2339.05 cw(c2524.92,2409.76) 2524.92,2309.76 C36.2@2414.41,2309.76
  Top Layer w100: C38.1@3582.9,3222.1 ccw(c3932.03,3222.1) 3685.15,2975.23 F4.2@3729.68,2930.71
  Bottom Layer w160: v1@2616.57,2619.66 2653.16,2656.24 2692.73,2695.82 2692.86,2695.94 cw(c2805.7,2582.52) 2739.7,2728.27 2739.84,2728.33 ccw(c2673.7,2874.02) 2743.92,2730.25 ccw(c2673.7,2874.02) 2772.48,2748.15 2819.99,2746.38 cw(c2814.14,2586.48) 2820.36,2746.36 ; 2820.38,2746.36 ccw(c2835.17,2873.5) 2861.98,2748.34 2936.68,2764.31 cw(c2970.25,2607.87) 3012.18,2762.28 3012.31,2762.24 ccw(c3065.67,2957.87) 3013.18,2762.01 3104.51,2737.6 ccw(c3145.68,2892.21) 3163.24,2733.18 3164.35,2733.3 3236.52,2741.35 cw(c3254.4,2582.35) 3254.4,2742.35 ccw(c3254.4,2902.35) 3323.46,2758.02 3330.84,2761.55 cw(c3386.1,2646.1) 3338.07,2764.74 3339.48,2765.32 3359.38,2773.35 cw(c3419.32,2625) 3419.32,2785 3494.05,2785.63 ccw(c3474.57,3087.63) 3688.53,2873.6 F4.2@3735.17,2920.21
  Bottom Layer w300: 2486.5,2560 2486.5,2398 2486.5,2340 2492.21,2334.29 ccw(c2562.92,2405) 2562.92,2305 2565,2305 2587.29,2327.29 ccw(c2516.57,2398) 2616.57,2398 2616.57,2600 v1@2616.57,2619.66 ; 2539.29,2717.44 2641.08,2717.44 cw(c2641.08,2644.17) 2682.82,2704.39 cw(c2854.34,2569.84) 2683.85,2705.7 ccw(c2584.59,2705.7) 2654.78,2775.89 2570.94,2859.72
  other v1: 2560,2250 2525,2275 2600,2275 2650,2275 2700,2275 2557.87,2299.17 2525,2325 2650,2325 2592.4,2325.83 2698.7,2325.83 2535,2360 2575,2375 2625,2375 2675,2375 2510.04,2387.78 2550,2425 2600,2425 2650,2425 2700,2425 2553.43,2533.9 2650,2535 2510.04,2553.02 2600,2560 2705,2560 2565,2600 2514.45,2600.83 2659.72,2600.83 2705,2604.4 2615,2605 2660,2645 2560,2650 2610,2650 2705,2650 2510.04,2650.71 2610,2695 2514.45,2696.1 2553.43,2696.1 2659.72,2696.1 2707.5,2708.91
Vin_sense: C22.2 J4.4 R33.1 R34.2 | length 530.7
  Top Layer w10: J4.4@1834.84,2495.28 cw(c1834.84,2485.28) J4.4@1836.83,2495.08 ; J4.4@1836.83,2495.08 1907.79,2481.03 ccw(c1910.31,2493.78) 1910.31,2480.78 1957.65,2480.78 cw(c1957.65,2478.12) 1959.53,2480 2004.91,2480.78 ccw(c2004.69,2493.78) 2017.69,2493.78 2017.69,2529.21 ccw(c2004.69,2529.21) 2017.56,2530.98 2017.56,2543.81 ccw(c2008.81,2543.81) 2015,2550 2001.12,2563.88 ccw(c1987.54,2550.29) 1987.54,2569.5 cw(c1987.54,2599.47) 1966.35,2578.28 R33.1@1955.4,2589.23
  Top Layer w20: R34.2@1716.5,2600 C22.2@1716.5,2530 1790.28,2530 cw(c1790.28,2495.28) J4.4@1825,2495.28 J4.4@1834.84,2495.28
Vmain: C19.1 C20.2 C21.2 C28.2 D1.1 D3.2 F2.1 J7.1 J7.2 J7.3 R33.2 U3.2 U3.3 | length 4583.1
  Top Layer w10: R33.2@2014.6,2610.77 cw(c2096.95,2610.77) 2014.91,2617.96 cw(c2096.95,2610.77) 2038.72,2669.01 2099.43,2723.07 2112.07,2735.71 cw(c2182.78,2665) 2182.78,2765 2279.5,2765 ccw(c2279.5,2806.71) 2308.99,2777.22 2313.29,2781.51 cw(c2345.85,2748.95) 2345.85,2795 2850.91,2795 cw(c2850.91,2695) 2921.62,2765.71 2926.31,2761.02 cw(c2857.01,2691.74) 2955,2691.74 2955,2420 ccw(c3010,2420) 3010,2365 3340,2365 ccw(c3340,2410) 3385,2410 3385,2480 cw(c3445.36,2480) 3402.68,2522.68 3405,2525 cw(c3453.28,2476.72) 3451.22,2544.97 ; 3453.28,2545 ccw(c3453.28,2476.72) 3451.22,2544.97 ; C19.1@3585.71,2642.29 cw(c3485.91,2642.29) 3583.43,2621.05 cw(c3485.91,2642.29) 3581.58,2613.88 cw(c3485.91,2642.29) 3562.96,2578.86 cw(c3485.91,2642.29) 3556.48,2571.72 3546.02,2561.26 cw(c3506.69,2600.59) 3506.69,2544.97 3451.22,2544.97 ; F2.1@3768.43,2757.22 ccw(c3762.14,2765) 3769.23,2757.95 F2.1@3790.73,2779.44
  Top Layer w20: U3.3@3506.87,2830 U3.3@3521.61,2830
  Top Layer w30: C19.1@3585.71,2642.29 3585.71,2633.78 cw(c3508.04,2633.78) 3563.05,2578.94 ; 3645,2630 ccw(c3645,2555.41) 3592.26,2608.15 3563.05,2578.94 ; F2.1@3780,2775 cw(c3790.73,2764.27) F2.1@3790.73,2779.44 ; 4187.11,2744.47 4202.7,2778.66 cw(c4230,2766.21) 4218.27,2793.82 cw(c4240.87,2740.63) J7.3@4240.87,2798.42 ; 3563.05,2578.94 cw(c3508.04,2633.78) 3562.96,2578.86 3563.05,2578.94
  Top Layer w40: D3.2@4155,2626.3 4155,2688.42 cw(c4212.8,2688.42) 4171.93,2729.29
  Top Layer w50: J7.1@4250,2995.27 J7.1@4250,3021.63
  Top Layer w60: 3525,2805 3562.95,2805 cw(c3562.95,2763.84) 3592.05,2792.95 ; C20.2@3562.36,2660.36 ccw(c3562.36,2713) 3615,2713 ; C19.1@3576.51,2646.91 C19.1@3583.43,2640 C19.1@3585.71,2642.29 ; F2.1@3780,2775 3675,2775 ; F2.1@3804.68,2779.44 3820.95,2795.71 cw(c3891.66,2725) 3891.66,2825 3913.58,2825 cw(c3913.58,2725) 3984.29,2795.71 4062.32,2717.68 ccw(c4105,2760.36) 4098.04,2700.4 4102.19,2700.4 ccw(c4102.19,2799.03) 4171.93,2729.29 4187.11,2744.47 4240.87,2798.23 J7.3@4240.87,2798.42 ; C19.1@3585.71,2642.29 ccw(c3515,2713) 3615,2713 ; C19.1@3585.71,2642.29 3626.1,2642.29 ccw(c3626.1,2742.29) 3696.81,2671.57 3749.53,2724.29 cw(c3678.82,2795) 3678.82,2695 3645,2695 3645.71,2695.71 ccw(c3575,2766.42) 3675,2766.42 3675,2775 ; 3592.05,2792.95 ccw(c3635.38,2836.27) 3635.38,2775 3675,2775 ; 3592.05,2792.95 3595,2790 cw(c3546.72,2741.72) 3615,2741.72 3615,2713
  Top Layer w80: D1.1@4183.3,3066.51 cw(c4165.02,2983.52) J7.1@4250,2983.52 ; J7.3@4250,2798.42 J7.2@4250,2896.85 J7.1@4250,2968.52
  Bottom Layer w80: J7.3@4250,2798.42 J7.2@4250,2896.85 J7.1@4250,2995.27
Vraw: C1.2 J2.5 J2.6 J2.7 T1.3 U1.12 | length 3857
  Top Layer w20: U1.12@2455,3846.93 ccw(c2455,3911.94) 2500.97,3865.97 v2(2535,3900) v2(2535,3941.28)
  Top Layer w80: T1.3@4030,3516.57 ccw(c4030,3604.87) 4092.44,3542.44 4102.14,3552.14 J2.5@4250,3700 J2.6@4250,3600 J2.7@4250,3500 4070.02,3500 cw(c4070.02,3556.59) T1.3@4030,3516.57
  Top Layer w200: T1.3@4030,3516.57 T1.3@4036.4,3522.97 ; T1.3@4044.17,3502.4 4158.74,3552.26 ; T1.3@4086.4,3537.97 cw(c4157.11,3467.26) 4152.14,3567.14 ; T1.3@4102.14,3552.14 cw(c4107.11,3452.26) T1.3@4107.11,3552.26
  Bottom Layer w20: v2(2535,3900) v2(2535,3941.28) 2535,4230 cw(c2635,4230) 2635,4330 3983.58,4330 cw(c3983.58,4230) 4054.29,4300.71 4148.27,4206.73 cw(c4077.56,4136.02) 4177.56,4136.02 4177.56,3813.86 ccw(c4277.56,3813.86) 4206.85,3743.15 J2.5@4250,3700
  Bottom Layer w80: J2.7@4250,3500 J2.6@4250,3600 J2.5@4250,3700
Vs: C2.2 C3.2 F1.2 F4.1 T1.2 | length 912.5
  Top Layer w100: 3831.18,3596.95 3831.18,3678.6
  Top Layer w120: 3821.18,3653.6 cw(c3921.18,3653.6) T1.2@3916.31,3753.48 ; 3834.81,3778.39 T1.2@3916.31,3778.49
  Top Layer w140: T1.2@3921.18,3768.6 3940.24,3768.6 4013.77,3768.6
  Top Layer w220: 3769.92,3596.99 3769.74,3340.79 ccw(c3989.47,3351.66) 3786.04,3267.88 3786.32,3267.2 ; 3786.33,3267.2 ccw(c3989.74,3350.99) 3826.55,3203.45 F4.1@3895,3135
pads on no net: U1.2 U1.14 U1.17 U1.22 U1.24 U1.29 U2.2 U2.4 U2.7 U2.12 U2.14 U2.17 U2.22 U2.24 U2.29 U4.1 U4.8

## Polygon pours and split planes (outlines as drawn)
drive on Top Layer "DRIVE_L01_P000" (solid, pour order 0): 3339.53,2741.81 3278.32,2741.81 ccw(c3317.31,2318.06) 2990,2590 2972.99,2407.01 ccw(c2876.1,2837.86) 3150.13,2491.55 3339.53,2741.81 ccw(c3339.32,2742.67) 3339.54,2743.52 cw(c3324.05,2742.8) 3334.27,2731.14
no net on Bottom Layer "NONET_L02_P003" (solid, pour order 3): 2974.22,2663.9
no net on Bottom Layer "NONET_L02_P002" (solid, pour order 2): 2974.22,2663.9
drive on Bottom Layer "DRIVE_L02_P001" (solid, pour order 1): 2970.95,2666.81 ccw(c3010.31,2706.16) 3010.31,2650.51 3038.52,2650.51 cw(c3038.52,2575.76) 3091.38,2628.62 3211.33,2508.67 cw(c3192.2,2489.54) 3219.25,2489.54 3040.14,2489.54 cw(c3040.14,2520.48) 3018.27,2498.6 ccw(c2986.57,2498.6) 3008.98,2521.02 2975,2555 2975,2659.96 ccw(c2964.71,2659.96) 2971.99,2667.24

## Other copper
Top Layer:
  text "20.08.20" at 1585,3475 h60 r90
  text "by S.D." at 1591.05,2769.01 h150 r90
Bottom Layer:
  text "by S.D." at 1550,3645 h250 r270
  text "In memories of  / 2020 summer" at 1515,2915 h150 r270
  text "20.08.20" at 1520,2370 h200 r270

## Silkscreen, mask and mechanical layers (free items; w line width, h text height)
Bottom Overlay:
  text "by S.D. /   y2020" at 4101.46,3527.33 h150 r45
Mechanical 1:
  the board outline again, w10

## Text inside footprints (layer, text, board x,y; h text height)
C8: Bottom Overlay "+" at 3400.02,3892.45 h78.74 r135
C19: Bottom Overlay "+" at 3553.9,2689.21 h78.74
C38: Bottom Overlay "+" at 3544.38,3267.59 h78.74 r10
J1: Mechanical 14 "1" at 3291.34,4170.08 h39.37 r180; Bottom Overlay "1" at 3291.34,4170.08 h39.37 r180
J2: Mechanical 14 "1" at 4195.08,4108.66 h39.37 r90; Bottom Overlay "1" at 4195.08,4108.66 h39.37 r90
J3: Mechanical 14 "1" at 4008.66,2329.92 h39.37; Bottom Overlay "1" at 4008.66,2329.92 h39.37
J4: Mechanical 14 "1" at 1879.92,2189.37 h39.37 r270; Bottom Overlay "1" at 1879.92,2189.37 h39.37 r270
J5: Mechanical 14 "1" at 1879.92,3697.56 h39.37 r270; Bottom Overlay "1" at 1879.92,3697.56 h39.37 r270
J6: Mechanical 14 "1" at 1879.92,2947.56 h39.37 r270; Bottom Overlay "1" at 1879.92,2947.56 h39.37 r270
J7: Mechanical 14 "1" at 4195.08,3005.9 h39.37 r90; Bottom Overlay "1" at 4195.08,3005.9 h39.37 r90